# Altium PCB P8.PcbDoc (part 2 of 2)
Units mil, origin at the board's own origin, x right, y up, seen from the top; angles counter-clockwise.
Board outline 3346.46 x 1968.5 mil, 4 copper layers (Top Layer, MidLayer1, Mid-Layer 2, Bottom Layer); 75 components, 59 nets, 241 pads, 150 vias.
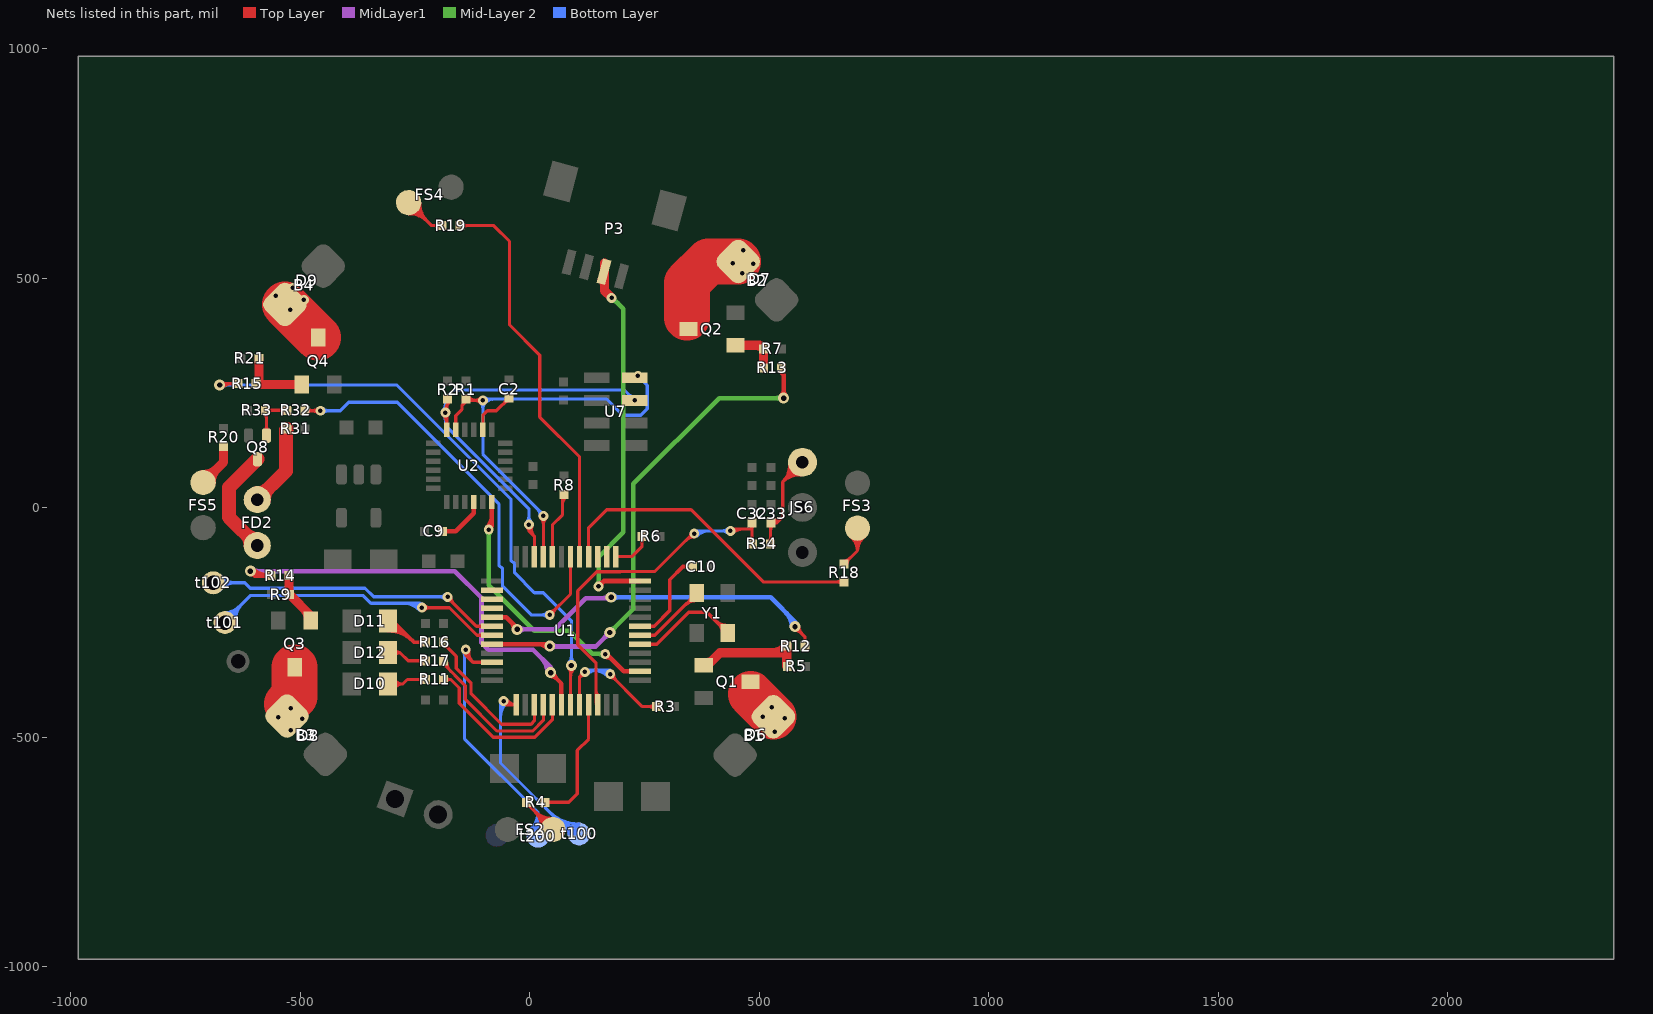
[diagram p4: the nets of this part, all layers, seen from the top]

## Via types
v1: diameter 21.65, hole 9.84, Top Layer to Bottom Layer, 140 vias
v2: diameter 23.82, hole 11.81, Top Layer to Bottom Layer, 10 vias

## Nets (pads, with @x,y where several pads share a name; then routed paths per layer and width w, separated by ;. In a path a pad name is that pad's centre, name@x,y a point inside that pad or via, vN(x,y) a via of type N, cw(c..) or ccw(c..) an arc to the next point about the centre after c; other vN are vias at no path point) (continued)
HW_LT: R19.2 U1.17 | length 896.8
  Top Layer w7: R19.2@-152.56,615.16 -78.74,615.16 -44.29,580.71 -44.29,398.62 21.65,332.68 21.65,197.83 108.27,111.22 U1.17@108.27,-106.3 ; R19.2@-148.08,610.67 cw(c-137.25,599.85) -137.25,615.16 cw(c-137.25,630.47) R19.2@-148.08,619.64
HW_RH: R18.2 U1.16 | length 725.7
  Top Layer w7: U1.16@127.95,-106.3 127.95,-43.31 167.32,-3.94 351.38,-3.94 508.86,-161.42 R18.2@685.04,-161.42 ; R18.2@680.56,-165.9 ccw(c669.73,-176.73) 669.73,-161.42 ccw(c669.73,-146.1) R18.2@680.56,-156.93
HW_RT: R4.2 U1.45 | length 306.8
  Top Layer w7: R4.2@32.48,-641.73 84.65,-641.73 103.35,-623.03 103.35,-528.54 127.95,-503.94 U1.45@127.95,-429.13 ; R4.2@36.96,-646.22 cw(c47.79,-657.04) 47.79,-641.73 cw(c47.79,-626.42) R4.2@36.96,-637.25
HWF_2: R32.1 U1.18 | length 1115
  Top Layer w7: R32.1@-490.15,212.6 -489.16,211.61 v1(-456.69,211.61) ; R32.1@-485.67,208.12 cw(c-477.23,199.68) -477.23,211.61 ; R32.1@-485.67,217.09 ccw(c-472.45,230.3) -472.45,211.61 ; v1@-461.87,206.43 ccw(c-474.38,193.93) -474.38,211.61 ccw(c-474.38,229.3) v1@-461.87,216.79 ; v1(43.31,-233.27) 88.58,-187.99 U1.18@88.58,-106.3 ; v1@43.31,-225.94 ccw(c43.31,-208.25) 55.81,-220.76 ccw(c68.32,-233.27) v1@50.63,-233.27
  Bottom Layer w7: v1(-456.69,211.61) -413.39,211.61 -394.68,230.31 -289.09,230.31 -67.34,8.56 -67.34,-124.94 -59.35,-132.93 -59.35,-170.96 2.95,-233.27 v1(43.31,-233.27) ; v1@-451.51,206.43 cw(c-439,193.93) -439,211.61 cw(c-439,229.3) v1@-451.51,216.79 ; v1@38.13,-238.45 ccw(c25.62,-250.96) 25.62,-233.27 ccw(c25.62,-215.58) v1@38.13,-228.09
HWJ_2: C32.1 R34.2 U1.46 | length 940.8
  Top Layer w7: 144.04,-396.93 ccw(c162.12,-396.93) U1.46@149.34,-409.72 ; U1.46@147.64,-429.13 144.04,-425.54 144.04,-337.6 104.33,-297.89 104.33,-181.1 146.01,-139.42 197.19,-139.42 197.83,-138.78 272.64,-138.78 352.36,-59.06 v1@362.2,-59.06 ; 340.72,-70.7 cw(c358.27,-88.25) v1@358.27,-63.43 ; 347.85,-63.57 ccw(c340.38,-56.1) v1@350.94,-56.1 ; v1(437.01,-50.2) 440.94,-46.26 484.26,-46.26 ; v1@437.24,-50.43 cw(c447.3,-60.49) 447.3,-46.26 ; v1@442.19,-55.38 cw(c464.2,-77.39) 464.2,-46.26 ; C32.1@480.13,-37.29 cw(c472.45,-46.26) 484.26,-46.26 cw(c496.06,-46.26) C32.1@488.38,-37.29 ; R34.2@480.75,-74.26 ccw(c472.29,-65.79) 484.26,-65.79 ; 484.26,-61.06 ccw(c502.91,-61.06) R34.2@489.72,-74.26 ; C32.1@484.26,-32.47 484.26,-46.26 ; R34.2@485.24,-78.74 484.26,-77.76 484.26,-46.26
  Bottom Layer w7: v1@358.5,-56.33 cw(c373.31,-71.15) 373.31,-50.2 ; v1@362.2,-50.2 v1(437.01,-50.2) ; v1@363.45,-61.28 cw(c390.21,-88.05) 390.21,-50.2 ; v1@431.83,-55.38 ccw(c419.32,-67.89) 419.32,-50.2 ccw(c419.32,-32.51) v1@431.83,-45.02
  other v1: 358.27,-56.1
JTCK: t100.1 U1.37 | length 733.6
  Top Layer w7: v1(-57.09,-421.26) -61.02,-421.26 -53.15,-429.13 U1.37@-29.53,-429.13 cw(c-29.53,-403.88) v1@-50.89,-417.35 ; v1@-56.81,-421.09 ccw(c-42.22,-411.88) -42.22,-429.13
  Bottom Layer w7: -63.98,-455.58 cw(c-22.76,-455.58) v1@-51.91,-426.44 ; -63.98,-438.68 cw(c-39.66,-438.68) v1@-56.86,-421.49 ; v1(-57.09,-421.26) -61.02,-421.26 -63.98,-418.31 -63.98,-556.1 90.55,-710.63 t100.1@107.28,-710.63 ; 42.02,-662.1 ccw(c107.28,-596.83) t100.1@107.28,-689.13 ; 53.97,-674.05 ccw(c107.28,-620.73) t100.1@107.28,-696.13 ; 65.92,-686 ccw(c107.28,-644.63) t100.1@107.28,-703.13 ; 77.87,-697.95 ccw(c107.28,-668.53) t100.1@107.28,-710.13 ; 82.41,-702.49 cw(c74.27,-710.63) t100.1@85.78,-710.63
JTMS: t200.1 U1.34 | length 775.2
  Top Layer w7: v1@-143.02,-315.62 cw(c-145.62,-320.87) -139.76,-320.87 ; v1(-139.76,-309.06) -139.76,-320.87 ; v1@-139.44,-309.11 ccw(c-119.14,-312.4) -133.68,-326.95 ; v1@-136.51,-315.62 ccw(c-133.91,-320.87) -139.76,-320.87 ; v1@-132.53,-310.23 ccw(c-102.51,-315.11) -124.02,-336.61 ; U1.34@-82.68,-336.61 -124.02,-336.61 ; -139.76,-320.87 -124.02,-336.61
  Bottom Layer w7: v1@-144.94,-314.24 cw(c-150.32,-319.61) -142.72,-319.61 ; -142.72,-333.87 cw(c-114.95,-333.87) v1@-134.58,-314.24 ; v1(-139.76,-309.06) -142.72,-312.01 -142.72,-502.95 17.72,-663.39 t200.1@17.72,-715.55 ; t200.1@2.51,-700.35 ccw(c-34.19,-663.65) 17.72,-663.65 ccw(c69.62,-663.65) t200.1@32.92,-700.35 ; t200.1@7.46,-705.3 ccw(c-17.29,-680.55) 17.72,-680.55 ccw(c52.72,-680.55) t200.1@27.97,-705.3
LED6: R11.2 U1.41 | length 381.2
  Top Layer w7: R11.2@-187.99,-374.02 -172.6,-374.02 -153.95,-392.66 -153.95,-425.77 -79.72,-500 10.83,-500 49.21,-461.61 U1.41@49.21,-429.13 ; R11.2@-183.51,-378.5 cw(c-172.68,-389.33) -172.68,-374.02 cw(c-172.68,-358.7) R11.2@-183.51,-369.53
LED7: R16.2 U1.39 | length 359.7
  Top Layer w7: R16.2@-187.99,-292.65 -187.99,-296.26 -160.43,-323.82 -160.43,-349.41 -127.95,-381.89 -127.95,-405.31 -61.8,-471.46 2.6,-471.46 9.84,-464.21 U1.39@9.84,-429.13 ; R16.2@-181.65,-292.65 ccw(c-157.61,-292.65) -174.61,-309.64
LED8: R17.2 U1.40 | length 382.8
  Top Layer w7: R17.2@-188.65,-333.33 ccw(c-173.57,-333.33) -184.23,-344 ; R17.2@-187.99,-333.33 -187.99,-340.24 -140.95,-387.27 -140.95,-417.12 -71.85,-486.22 6.22,-486.22 29.53,-462.91 U1.40@29.53,-429.13 ; R17.2@-181.65,-333.33 ccw(c-149.67,-333.33) -172.28,-355.95
MPU-INT: U1.2 U2.12 | length 681.5
  Top Layer w10: v1@-93.69,-43.12 ccw(c-120.27,-16.54) -82.68,-16.54 ; v1(-89.57,-47.24) -82.68,-40.35 U2.12@-82.68,12.8 ; v1@164.37,-324.72 cw(c164.37,-345.92) 179.36,-330.93 ; v1(164.37,-318.9) 167.32,-318.9 204.72,-356.3 U1.2@240.16,-356.3
  Mid-Layer 2 w10: v1@-93.69,-51.36 cw(c-103.63,-61.31) -89.57,-61.31 cw(c-75.5,-61.31) v1@-85.45,-51.36 ; v1(-89.57,-47.24) -89.57,-168.31 9.84,-267.72 85.63,-267.72 135.83,-317.91 v1@164.37,-317.91 ; 147.93,-317.91 cw(c147.93,-335.34) v1@160.25,-323.02 ; 152.68,-317.91 ccw(c152.68,-307.21) v1@160.25,-314.78
NetB1_1: B1.1 D6.1 Q1.3 | length 70
  Top Layer w100: 481.3,-405.78 B1.1@530.77,-455.25
  other v1: 533.19,-487.83 555.12,-458.66 507.87,-454.72 527.56,-434.06
NetB2_2: B2.2 D7.1 Q2.3 | length 206.8
  Top Layer w100: 342.52,414.37 342.52,490.16 389.12,536.76 B2.2@454.23,536.76
  other v1: 462.6,510.83 487.12,531.5 441.93,533.46 464.57,561.02
NetB3_2: B3.2 D8.1 Q3.3 | length 205.6
  Top Layer w30: B3.2@-545.73,-460.04 ccw(c-570.24,-427.17) -529.24,-427.17 B3.2@-529.24,-453.64 ; B3.2@-535.28,-449.72 cw(c-509.32,-456.67) B3.2@-522.76,-433.39 ; B3.2@-534.09,-445.27 cw(c-517.31,-449.77) B3.2@-521.73,-432.97 ; B3.2@-529.24,-447.62 cw(c-510.06,-447.62) B3.2@-523.62,-434.06
  Top Layer w100: B3.2@-529.24,-427.17 -512.79,-410.72 Q3.3@-512.79,-347.44
  other v1: -520.89,-484.26 -495.84,-459.2 -548.23,-456.69 -520.67,-437.01
NetB4_1: B4.1 D9.1 Q4.3 | length 102.1
  Top Layer w100: B4.1@-533.77,443.24 Q4.3@-461.61,371.06
  other v1: -522.64,432.09 -492.48,453.03 -553.25,462.73 -516.73,479.33
NetC2_1: C2.1 U2.20 | length 128.1
  Top Layer w7: U2.20@-102.36,170.28 -102.36,201.77 -92.52,211.61 -72.85,211.61 C2.1@-45.28,239.18 ; C2.1@-51.62,239.18 cw(c-66.94,239.18) -56.11,228.35 cw(c-45.28,217.53) C2.1@-45.28,232.84
NetC9_2: C9.2 U2.10 | length 127.2
  Top Layer w10: C9.2@-189.95,-51.17 -161.41,-51.17 -122.05,-11.81 U2.10@-122.05,12.8 ; C9.2@-186.53,-54.6 cw(c-178.26,-62.87) -178.26,-51.17 cw(c-178.26,-39.48) C9.2@-186.53,-47.75
NetC33_1: C33.1 JS6.1 R34.1 | length 481.2
  Top Layer w7: R34.1@520.12,-74.26 ccw(c509.29,-63.43) 524.61,-63.43 ccw(c539.92,-63.43) R34.1@529.09,-74.26 ; C33.1@521.1,-36.96 cw(c512.63,-45.43) 524.61,-45.43 ; R34.1@524.61,-78.74 524.61,-33.45 C33.1@525.58,-32.47 538.39,-32.47 ; 524.61,-50.15 cw(c543.26,-50.15) C33.1@530.07,-36.96 ; C33.1@525.42,-33.11 ccw(c529.8,-15.75) 542.46,-28.41 ; C33.1@527.13,-26.32 ccw(c533.31,-1.81) 551.18,-19.69 ; C33.1@530.63,-36.32 cw(c538.39,-42.23) 538.39,-32.47 ; C33.1@530.63,-28.63 ccw(c538.39,-22.72) 538.39,-32.47 ; JS6.1@566.11,97.16 cw(c514.74,93.02) 551.18,56.58 ; JS6.1@573.09,97.72 cw(c534.56,94.62) 561.89,67.29 cw(c589.22,39.96) JS6.1@592.33,78.48 ; JS6.1@591.77,71.5 ccw(c587.62,20.14) 551.18,56.58 ; JS6.1@594.02,99.41 551.18,56.57 ; 538.39,-32.47 551.18,-19.69 ; 551.18,-19.69 551.18,56.57
NetD10_2: D10.2 R11.1 | length 154.4
  Top Layer w7: D10.2@-309.05,-383.86 -276.57,-383.86 -266.73,-374.02 R11.1@-227.36,-374.02 ; D10.2@-295.73,-393.59 cw(c-276.58,-407.57) -276.58,-383.86 cw(c-276.58,-360.14) D10.2@-295.73,-374.13 ; R11.1@-231.85,-378.5 ccw(c-242.67,-389.33) -242.67,-374.02 ccw(c-242.67,-358.7) R11.1@-231.85,-369.53
NetD11_2: D11.2 R16.1 | length 258.3
  Top Layer w8: D11.2@-309.05,-268.05 cw(c-309.05,-344.88) -254.73,-290.55 ; D11.2@-309.05,-260.05 cw(c-309.05,-317.56) -268.38,-276.89 ; D11.2@-309.05,-252.05 cw(c-309.05,-290.25) -282.04,-263.24 ; D11.2@-309.05,-247.05 -298.23,-247.05 -252.63,-292.65 R16.1@-227.36,-292.65 ; R16.1@-231.49,-296.78 ccw(c-241.47,-306.75) -241.47,-292.65 ccw(c-241.47,-278.54) R16.1@-231.49,-288.52
NetD12_2: D12.2 R17.1 | length 141
  Top Layer w7: D12.2@-309.05,-315.45 -282.97,-315.45 ; D12.2@-294.14,-322.52 cw(c-282.97,-327.81) -282.97,-315.45 ; D12.2@-294.14,-308.39 ccw(c-282.97,-303.09) -282.97,-315.45 ; R17.1@-231.85,-337.82 ccw(c-242.67,-348.64) -242.67,-333.33 ccw(c-242.67,-318.02) R17.1@-231.85,-328.85 ; R17.1@-227.36,-333.33 -265.09,-333.33 -282.97,-315.45
NetFD2_1: FD2.1 R31.1 | length 236.2
  Top Layer w30: FD2.1@-594.02,17.88 -531.5,80.4 -531.5,170.28 R31.1@-529.52,172.25 ; FD2.1@-594.02,32.41 ccw(c-594.02,67.48) -569.22,42.68 ccw(c-544.42,17.88) FD2.1@-579.49,17.88
NetFD2_2: FD2.2 Q8.3 | length 294.7
  Top Layer w30: FD2.2@-608.54,-82.12 ccw(c-643.62,-82.12) -618.82,-57.32 ccw(c-594.02,-32.52) FD2.2@-594.02,-67.59 ; FD2.2@-594.02,-82.12 -655.51,-20.62 -655.51,44.29 Q8.3@-593.5,106.3
NetFS2_1: FS2.1 R4.1 | length 262.9
  Top Layer w7: R4.1@-6.89,-648.07 cw(c-6.89,-658.16) R4.1@0.24,-651.03 ; R4.1@-6.89,-641.73 -6.89,-643.9 FS2.1@50.2,-700.98 ; R4.1@-0.55,-641.73 ccw(c19.99,-641.73) 5.47,-656.25 ; FS2.1@26.14,-700.98 ccw(c-31.94,-700.98) 9.13,-659.91 ccw(c50.2,-618.84) FS2.1@50.2,-676.93 ; FS2.1@33.14,-700.98 ccw(c-8.05,-700.98) 21.08,-671.86 ccw(c50.2,-642.74) FS2.1@50.2,-683.93
NetFS3_1: FS3.1 R18.1 | length 231.4
  Top Layer w7: R18.1@685.04,-122.05 714.02,-93.07 ; R18.1@685.04,-115.7 ccw(c685.04,-100.39) 695.87,-111.22 ccw(c706.69,-122.05) R18.1@691.38,-122.05 ; FS3.1@699.35,-63.28 cw(c676.44,-93.07) 714.02,-93.07 ; FS3.1@703.62,-57.73 cw(c687.37,-78.85) 714.02,-78.85 cw(c740.66,-78.85) FS3.1@724.42,-57.73 ; FS3.1@714.02,-44.21 714.02,-93.07 ; FS3.1@728.68,-63.28 ccw(c751.59,-93.07) 714.02,-93.07
NetFS4_1: FS4.1 R19.1 | length 273
  Top Layer w7: FS4.1@-264.2,641.12 cw(c-264.2,583.03) -223.13,624.1 cw(c-182.06,665.18) FS4.1@-240.14,665.18 ; FS4.1@-264.2,648.12 cw(c-264.2,606.93) -235.08,636.05 cw(c-205.95,665.18) FS4.1@-247.14,665.18 ; FS4.1@-264.2,665.18 -214.18,615.16 R19.1@-191.93,615.16 ; R19.1@-196.41,610.67 ccw(c-207.24,599.85) -207.24,615.16 ccw(c-207.24,630.47) R19.1@-196.41,619.64
NetFS5_1: FS5.1 R20.1 | length 163.8
  Top Layer w20: FS5.1@-712.01,55.2 -667.32,99.88 R20.1@-667.32,133.86 ; FS5.1@-712.01,72.76 ccw(c-712.01,115.15) -682.03,85.17 ccw(c-652.06,55.2) FS5.1@-694.45,55.2
NetQ1_1: Q1.1 R5.1 R12.1 | length 324.3
  Top Layer w20: Q1.1@378.94,-343.5 386.81,-343.5 414.37,-315.94 545.28,-315.94 ; Q1.1@382.88,-337.76 ccw(c382.88,-314.38) 399.41,-330.91 ; 524.78,-315.94 ccw(c524.78,-265.92) R12.1@560.15,-301.29 ; R12.1@560.2,-301.18 cw(c545.28,-301.02) 545.28,-315.94 ; R5.1@561.02,-345.47 560.04,-344.49 R12.1@560.04,-301.18 545.28,-315.94
NetQ2_1: Q2.1 R7.2 R13.1 | length 126.4
  Top Layer w20: Q2.1@447.83,354.33 500.98,354.33 R7.2@508.86,346.46 R13.1@508.86,305.12 ; 490.23,354.33 cw(c490.23,327.83) R7.2@508.97,346.57
NetQ3_1: Q3.1 R9.2 R14.1 | length 139.1
  Top Layer w20: R14.1@-524.61,-147.64 -524.61,-187.99 R9.2@-523.62,-188.98 -477.36,-235.23 Q3.1@-477.36,-245.08 ; -491.35,-221.25 cw(c-511.25,-241.14) Q3.1@-483.11,-241.14
NetQ4_1: Q4.1 R15.1 R21.2 | length 173.3
  Top Layer w20: R15.1@-596.34,270.56 ccw(c-610.33,284.54) -590.55,284.54 ; R21.2@-590.55,325.79 -590.55,276.57 R15.1@-596.46,270.67 -594.49,268.7 Q4.1@-497.05,268.7
NetQ8_1: Q8.1 R32.2 R33.2 | length 198.4
  Top Layer w7: R33.2@-580.27,208.12 cw(c-595.85,192.54) -573.82,192.54 ; Q8.1@-578.3,167.88 ccw(c-589.13,178.7) -573.82,178.7 ccw(c-558.5,178.7) Q8.1@-569.33,167.88 ; Q8.1@-573.82,157.49 -573.82,210.64 R33.2@-575.78,212.6 R32.2@-529.52,212.6 ; -573.82,202.04 cw(c-565.22,202.04) -571.3,208.12 cw(c-560.47,197.29) -560.47,212.6 cw(c-560.47,227.92) R33.2@-571.3,217.09 ; R32.2@-534.01,208.12 ccw(c-544.84,197.29) -544.84,212.6 ccw(c-544.84,227.92) R32.2@-534.01,217.09
NetR3_1: R3.1 U1.44 | length 427.8
  Top Layer w7: U1.44@108.27,-429.13 108.27,-369.09 ; v1@112.76,-357.59 cw(c97.4,-358.22) 108.27,-369.09 ; v1@119.78,-364.6 ccw(c119.14,-379.96) 108.27,-369.09 ; v1(120.08,-357.28) 108.27,-369.09 ; v1@170.96,-358.78 245.25,-433.07 R3.1@275.59,-433.07 ; v1@175.2,-369.53 cw(c175.2,-385.24) 186.31,-374.13 ; v1@182.52,-362.2 ccw(c202.19,-362.2) 188.28,-376.11 ; R3.1@271.1,-437.56 ccw(c260.28,-448.38) 260.28,-433.07 ccw(c260.28,-417.76) R3.1@271.1,-428.59
  Bottom Layer w7: v1(120.08,-357.28) 123.38,-353.98 v1@175.76,-353.98 ; v1@125.26,-362.46 cw(c145.73,-382.94) 145.73,-353.98 ; 137.66,-353.98 cw(c137.66,-399.74) v1@170.02,-367.39 ; 154.56,-353.98 cw(c154.56,-382.84) v1@174.97,-362.44
  other v1: 175.2,-362.2
NetR6_2: R6.2 U1.13 | length 112.7
  Top Layer w7: U1.13@187.01,-106.3 222.44,-106.3 244.1,-84.64 R6.2@244.1,-62.01 ; R6.2@239.61,-66.49 cw(c228.78,-77.32) 244.1,-77.32 cw(c259.41,-77.32) R6.2@248.58,-66.49
NetR8_2: R8.2 U1.20 | length 173.2
  Top Layer w7: U1.20@49.21,-106.3 49.21,-37.4 70.87,-15.75 70.87,25.59 R8.2@77.76,32.48 ; 70.87,4.71 cw(c99.62,4.71) R8.2@79.29,25.04
NetU1_5: U1.5 Y1.1 | length 297.8
  Top Layer w8: U1.5@240.16,-297.24 276.57,-297.24 346.46,-227.36 385.83,-227.36 Y1.1@431.1,-272.64 ; 404.33,-245.86 ccw(c431.1,-219.09) Y1.1@431.1,-256.95 ; 413.83,-255.37 cw(c400.5,-268.7) Y1.1@419.35,-268.7 ; Y1.1@417.98,-259.52 ccw(c431.1,-246.4) Y1.1@431.1,-264.95
NetU1_6: U1.6 Y1.3 | length 225.8
  Top Layer w7: U1.6@240.16,-277.56 272.64,-277.56 322.34,-227.85 Y1.3@364.17,-186.02 ; 336.54,-213.65 cw(c364.17,-241.28) Y1.3@364.17,-202.21 ; 346.05,-204.15 ccw(c331.86,-189.96) Y1.3@351.93,-189.96 ; Y1.3@348.49,-201.7 cw(c364.17,-217.38) Y1.3@364.17,-195.21
PWM1: R12.2 U1.29 | length 982.1
  Top Layer w7: v2@577.76,-267.27 cw(c577.76,-287.57) 592.11,-273.21 cw(c606.47,-258.86) v2@586.17,-258.86 ; v2(577.76,-258.86) 599.41,-280.51 R12.2@599.41,-301.18 ; R12.2@594.92,-296.7 ccw(c584.1,-285.87) 599.41,-285.87 ccw(c614.72,-285.87) R12.2@603.89,-296.7
  Top Layer w10: U1.29@-82.68,-238.19 -51.18,-238.19 -27.56,-261.81 v2(-27.56,-264.76) ; -41.44,-247.93 cw(c-58.28,-264.76) v2@-34.47,-264.76
  MidLayer1 w10: v2(-27.56,-264.76) 54.13,-264.76 122.05,-196.85 v2@172.24,-196.85 ; v2@-22.67,-269.65 cw(c-10.88,-281.44) -10.88,-264.76 cw(c-10.88,-248.08) v2@-22.67,-259.88 ; 155.73,-196.85 ccw(c155.73,-173.45) v2@172.28,-190 ; 165.24,-196.85 cw(c165.24,-206.81) v2@172.28,-199.77
  Bottom Layer w10: v2(177.17,-194.88) 524.61,-194.88 577.76,-248.03 v2(577.76,-258.86) ; v2@182.05,-199.77 cw(c193.85,-211.56) 193.85,-194.88 cw(c193.85,-178.2) v2@182.05,-190 ; 558.31,-228.58 cw(c528.03,-258.86) v2@570.85,-258.86 ; 575.38,-245.65 cw(c562.17,-258.86) v2@580.85,-258.86
PWM2: R13.2 U1.32 | length 1264.3
  Top Layer w9.84: U1.32@-82.68,-297.24 39.37,-297.24 v2(43.31,-301.18) ; 16.93,-297.24 cw(c16.93,-327.56) v2@38.37,-306.12 ; R13.2@544.29,306.1 544.29,299.21 553.15,290.35 ; v2@548.21,244.11 ccw(c536.28,256.04) 553.15,256.04 ccw(c570.02,256.04) v2@558.09,244.11 ; R13.2@552.21,302.23 ccw(c559.64,296.84) 553.15,290.35 ; v2(553.15,239.17) 553.15,290.35
  MidLayer1 w10: v2@43.31,-302.17 143.7,-302.17 v2(174.21,-271.65) ; v2@48.19,-306.07 cw(c57.61,-315.49) 57.61,-302.17 ; v2@48.19,-296.3 ccw(c62.36,-282.12) 62.36,-302.17 ; v2@167.3,-271.65 cw(c150.62,-271.65) 162.42,-283.45 cw(c174.21,-295.24) v2@174.21,-278.56 ; v2@550.2,242.13 v2(553.15,239.17)
  Mid-Layer 2 w10: v2(174.21,-271.65) 225.39,-220.47 225.39,52.17 412.4,239.17 v2(553.15,239.17) ; v2@174.21,-264.74 ccw(c174.21,-248.06) 186.01,-259.86 ccw(c197.8,-271.65) v2@181.12,-271.65 ; v2@548.26,234.29 ccw(c536.47,222.49) 536.47,239.17 ccw(c536.47,255.85) v2@548.26,244.06
PWM3: R14.2 U1.42 | length 1143.2
  Top Layer w9.84: v2@-611.27,-139.81 ccw(c-592.38,-120.92) -592.38,-147.64 ; v2(-609.25,-137.8) -599.41,-147.64 ; v2@-608.24,-144.71 cw(c-606.74,-154.97) -599.41,-147.64 ; v2@-604.31,-132.85 ccw(c-568.62,-97.16) R14.2@-568.62,-147.64 ; v2@-602.34,-138.81 ccw(c-592.08,-140.31) -599.41,-147.64 ; R14.2@-567.46,-151.12 ccw(c-575.86,-159.52) -575.86,-147.64 ccw(c-575.86,-135.76) R14.2@-567.46,-144.16 ; R14.2@-563.98,-147.64 -599.41,-147.64 ; v2@45.28,-366.24 cw(c45.28,-383.11) 57.21,-371.18 cw(c69.13,-359.25) v2@52.26,-359.25 ; v2(45.28,-359.25) 68.9,-382.87 U1.42@68.9,-429.13
  MidLayer1 w10: v2(-609.25,-137.8) -163.39,-137.79 -105.32,-195.87 -105.32,-294.29 -90.55,-309.06 6.89,-309.06 45.28,-347.44 v2(45.28,-359.25) ; v2@-604.37,-142.68 cw(c-592.57,-154.48) -592.57,-137.79 cw(c-592.57,-121.12) v2@-604.37,-132.91 ; 25.13,-327.29 cw(c-6.83,-359.25) v2@38.37,-359.25 ; 42.2,-344.37 cw(c27.31,-359.25) v2@48.37,-359.25
PWM4: R15.2 U1.43 | length 1446.4
  Top Layer w7: v2(-676.18,267.72) -673.23,270.67 R15.2@-635.83,270.67 ; v2@-670.23,261.77 cw(c-648.75,240.28) -648.75,270.67 ; v2@-670.23,273.66 ccw(c-663.01,280.89) -663.01,270.67 ; R15.2@-640.31,266.18 ccw(c-651.14,255.36) -651.14,270.67 ccw(c-651.14,285.98) R15.2@-640.31,275.15 ; v2@84.6,-349.45 cw(c75,-359.06) 88.58,-359.06 ; U1.43@88.58,-429.13 88.58,-345.47 v2(90.55,-343.5) ; 88.58,-368.56 cw(c115.6,-368.56) v2@96.5,-349.45
  Bottom Layer w7: v2(-676.18,267.72) -289.72,267.72 -41.34,19.33 -41.34,-114.17 -33.35,-122.16 -33.35,-141.84 9.84,-185.04 29.53,-185.04 90.55,-246.06 v2(90.55,-343.5) ; v2@-670.23,261.77 cw(c-655.88,247.41) -655.88,267.72 cw(c-655.88,288.02) v2@-670.23,273.66 ; v2@84.6,-337.56 ccw(c70.25,-323.2) 90.55,-323.2 ccw(c110.85,-323.2) v2@96.5,-337.56
R_INT: U1.14
R_K: U1.15
RST: C10.1 U1.7 | length 229.6
  Top Layer w8: U1.7@240.16,-257.87 271.11,-257.87 305.12,-223.87 305.12,-156.5 333.67,-127.95 C10.1@354.34,-127.95 ; C10.1@350.21,-132.08 ccw(c340.23,-142.05) 340.23,-127.95 ccw(c340.23,-113.84) C10.1@350.21,-123.81
RX: t101.1 U1.31 | length 889.5
  Top Layer w7: v1(-235.24,-217.52) -175.2,-217.52 -115.16,-277.56 U1.31@-82.68,-277.56 ; v1@-230.06,-222.7 cw(c-217.55,-235.21) -217.55,-217.52 cw(c-217.55,-199.83) v1@-230.06,-212.34
  Bottom Layer w7: t101.1@-664.37,-250 -664.37,-246.06 -609.5,-191.2 -362.94,-191.2 -346.46,-207.68 -245.08,-207.68 v1(-235.24,-217.52) ; t101.1@-664.37,-235.5 ccw(c-664.37,-210) -646.34,-228.03 ; t101.1@-664.37,-228.5 ccw(c-664.37,-186.1) -634.39,-216.08 ; t101.1@-649.87,-250 cw(c-605.36,-250) -636.83,-218.53 ; t101.1@-642.87,-250 cw(c-581.46,-250) -624.88,-206.58 ; -276.69,-207.68 cw(c-276.69,-258.97) v1@-240.42,-222.7 ; -259.79,-207.68 cw(c-259.79,-242.07) v1@-235.47,-217.75 ; -242.89,-207.68 cw(c-242.89,-225.17) v1@-230.52,-212.8
SCL: R1.1 U1.21 U2.23 U7.8 | length 1164.1
  Top Layer w7: U2.23@-161.42,170.28 -161.42,200.79 -148.13,214.07 -148.13,222.46 ; R1.1@-145.26,235.1 cw(c-156.73,231.06) -148.13,222.46 ; R1.1@-134.79,241.69 ccw(c-116.84,259.64) -116.84,234.26 ; v1@-107.54,229.08 ccw(c-120.05,216.57) -120.05,234.26 ccw(c-120.05,251.95) v1@-107.54,239.44 ; v1(-102.36,234.26) -136.33,234.26 -148.13,222.46 ; v1@24.35,-22.9 cw(c11.84,-35.4) 29.53,-35.4 cw(c47.22,-35.4) v1@34.71,-22.9 ; U1.21@29.53,-106.3 v1(29.53,-17.72)
  Bottom Layer w7: v1@-107.54,229.08 cw(c-120.05,216.57) -102.36,216.57 cw(c-84.67,216.57) -97.18,229.08 cw(c-77.56,209.46) -77.56,237.2 ; v1@-97.18,239.44 ccw(c-91.78,244.84) -91.78,237.2 ; 14.93,-0.17 cw(c-2.62,-17.72) v1@22.2,-17.72 ; 22.06,-7.3 ccw(c29.53,0.17) v1@29.53,-10.39 ; v1(29.53,-17.72) 29.53,-14.76 -102.36,117.13 v1(-102.36,234.26) -99.42,237.2 167.32,237.2 202.76,201.77 242.13,201.77 255.91,215.55 255.91,266.73 v1(235.24,287.4) ; v1@235.24,280.07 cw(c235.24,262.39) 247.74,274.89 cw(c260.25,287.4) v1@242.56,287.4
SCLK: U1.26
SDA: R2.1 U1.22 U2.24 U7.7 | length 1159.4
  Top Layer w7: v1@-189.24,202.5 cw(c-208.87,182.86) U2.24@-181.1,182.86 ; v1@-187,214.38 ccw(c-190.98,223.43) -181.1,223.43 ; v1(-184.05,207.68) v1@-181.1,210.63 ; R2.1@-181.52,231.33 cw(c-183.54,226.33) -178.15,226.33 cw(c-170.78,226.33) R2.1@-175.27,232.18 ; U2.24@-181.1,170.28 v1@-181.1,210.63 ; -181.1,197.12 cw(c-173.49,197.12) v1@-178.87,202.5 ; -181.1,218.24 ccw(c-173.49,218.24) v1@-178.87,212.86 ; R2.1@-179.13,237.21 -178.15,236.23 -178.15,226.38 -181.1,223.43 ; v1@-6.07,-42.49 cw(c-11.26,-50.2) -1.97,-50.2 ; v1(-1.97,-36.42) -1.97,-50.2 ; v1@-1.66,-36.53 ccw(c14.05,-42.46) 2.17,-54.34 ; v1@2.13,-42.49 ccw(c7.32,-50.2) -1.97,-50.2 ; v1@4.89,-39 ccw(c25.19,-46.67) 9.84,-62.01 ; U1.22@9.84,-106.3 9.84,-62.01 ; v1@-181.1,210.63 -181.1,223.43 ; -1.97,-50.2 9.84,-62.01
  Bottom Layer w7: v1@-189.24,202.5 cw(c-201.74,189.99) -184.05,189.99 cw(c-166.37,189.99) v1@-178.87,202.5 ; v1@-189.24,212.86 ccw(c-201.74,225.37) -184.05,225.37 ccw(c-166.37,225.37) v1@-178.87,212.86 ; v1@-7.15,-31.24 ccw(c-19.66,-18.73) -1.97,-18.73 ccw(c15.72,-18.73) v1@3.21,-31.24 ; v1(-1.97,-36.42) -1.97,-1.65 -184.05,180.43 v1(-184.05,207.68) -184.05,239.17 -166.34,256.89 205.71,256.89 v1(228.35,234.25) ; v1@221.02,234.25 ccw(c203.33,234.25) 215.84,246.76 ccw(c228.35,259.27) v1@228.35,241.58
SDI: U1.28
SDO: U1.27
TX: t102.1 U1.30 | length 876.8
  Top Layer w7: v1@-179.13,-201.22 cw(c-179.13,-215.77) -168.85,-205.49 ; v1(-179.13,-193.9) -179.13,-195.87 -170.48,-204.52 ; v1@-178.87,-201.22 cw(c-178.46,-212.5) -170.48,-204.52 ; v1@-178.64,-201.21 cw(c-177.87,-212.58) -169.81,-204.52 ; v1@-172.26,-196.43 ccw(c-165.05,-199.08) -170.48,-204.52 ; v1@-172.08,-195.87 ccw(c-163.55,-198.26) -169.81,-204.52 ; v1@-171.81,-193.9 ccw(c-150.98,-193.9) -165.71,-208.62 ; U1.30@-82.68,-257.87 -116.46,-257.87 -169.81,-204.52 ; -170.48,-204.52 -169.81,-204.52
  Bottom Layer w7: t102.1@-689.96,-163.39 -621.06,-163.39 -609.25,-175.2 -359.25,-175.2 -340.55,-193.9 v1(-179.13,-193.9) ; t102.1@-679.71,-173.64 cw(c-654.95,-198.39) -654.95,-163.39 cw(c-654.95,-128.38) t102.1@-679.71,-153.13 ; t102.1@-674.76,-178.59 cw(c-638.06,-215.29) -638.06,-163.39 cw(c-638.06,-111.48) t102.1@-674.76,-148.18 ; v1@-184.31,-199.08 ccw(c-196.82,-211.59) -196.82,-193.9 ccw(c-196.82,-176.21) v1@-184.31,-188.72
U2TX: P3.2 U1.12 | length 914.6
  Top Layer w10: v1(149.61,-171.26) 161.42,-159.45 U1.12@240.16,-159.45 ; v1@149.61,-165.43 ccw(c149.61,-151.37) 159.55,-161.31 ccw(c169.5,-171.26) v1@155.43,-171.26
  Top Layer w20: P3.2@157.24,497.64 cw(c144.06,484.46) 162.69,484.46 ; P3.2@162.69,533.34 162.69,473.13 v1(178.15,457.68)
  Mid-Layer 2 w10: v1@145.49,-167.14 ccw(c133.16,-154.82) 150.59,-154.82 ; v1@150.59,-171.26 150.59,-106.3 203.74,-53.15 203.74,434.06 179.13,458.66 v1(178.15,457.68) ; 150.59,-159.57 ccw(c161.3,-159.57) v1@153.73,-167.14 ; v1@178.15,451.85 cw(c178.15,433.03) 191.46,446.34
pads on no net: SP2.4 U1.10 U1.11 U1.33 U1.38 U2.2 U2.3 U2.4 U2.5 U2.6 U2.7 U2.14 U2.15 U2.16 U2.17 U2.19 U2.21 U2.22 U7.6 Y1.2 Y1.4

## Polygon pours and split planes (outlines as drawn)
GND on MidLayer1 "Keep-Out Layer-No Net" (solid, remove dead copper, pour order 4): -600.39,810.04 -589.57,820.87 825.79,820.87 825.79,-860.24 827.76,-862.2 795.28,-829.72 -759.84,-829.72 -759.84,-327.76 -884.84,-202.76
GND on Mid-Layer 2 "Keep-Out Layer-No Net" (solid, remove dead copper, pour order 6): -579.72,889.76 -518.7,828.74 820.87,828.74 820.87,-155.51 980.32,-314.96 387.8,-907.48 336.61,-907.48 -567.91,-907.48 -841.54,-633.86 -897.64,-577.76 -897.64,174.21
GND on Bottom Layer "Keep-Out Layer-No Net" (solid, remove dead copper, pour order 8): -762.8,846.46 739.17,846.46 980.32,605.31 980.32,-149.61 980.32,-694.88 784.45,-890.75 764.76,-871.06 -663.39,-871.06 -663.39,-491.14 -893.7,-260.83
GND on Top Layer "Keep-Out Layer-No Net" (solid, remove dead copper, pour order 10): -802.17,833.66 -782.48,813.98 817.91,813.98 817.91,-879.92 846.46,-908.46 791.34,-853.35 -747.05,-853.35

## Keep-outs
Keep-Out Layer:
  circle w3.94: c0,464.57 r29.53
  circle w3.94: c208.18,-519.69 r25.59
  circle w3.94: c0,0 r767.72
  circle w3.94: c314.59,-519.96 r29.53
  circle w3.94: c-314.59,-519.96 r29.53
  circle w3.94: c-208,-520 r25.59

## Other copper
Top Layer:
  pour cut-out: -348.43,-558.07 -236.46,-540.72 -136.81,-583.66 -99.49,-650.67 -116.14,-697.83 -141.73,-756.89 -271.65,-719.49 -375,-674.21
  pour cut-out: -189.96,149.57 -188.94,150.59 -73.82,150.59 -73.82,33.43 -73.85,33.46 -190.94,33.46
  pour cut-out: -418.31,-623.03 -378.94,-573.82 -353.35,-557.09 -351.87,-527.07 -351.87,-491.63 -490.65,-352.85 -550.69,-352.85 -612.7,-414.86 -626.97,-438.98 -606.3,-470.47 -534.45,-551.18 -454.72,-622.05 -438.98,-629.92
  pour cut-out: 615.16,-425.2 565.94,-385.83 549.21,-360.24 519.19,-358.76 483.76,-358.76 344.98,-497.54 344.98,-557.58 406.99,-619.59 431.1,-633.86 462.6,-613.19 543.31,-541.34 614.17,-461.61 622.05,-445.87
  pour cut-out: 627.95,413.39 578.74,374.02 562.01,348.42 531.99,346.95 496.56,346.95 357.78,485.73 357.78,545.77 419.78,607.78 443.9,622.05 475.39,601.38 556.1,529.53 626.97,449.8 634.84,434.05
  pour cut-out: -423.23,618.11 -383.86,568.9 -358.27,552.17 -356.79,522.15 -356.79,486.71 -495.57,347.93 -555.61,347.93 -617.62,409.94 -631.89,434.06 -611.22,465.55 -539.37,546.26 -459.65,617.13 -443.9,625

## Silkscreen, mask and mechanical layers (free items; w line width, h text height)
Top Overlay:
  text "+" at -346.46,613.19 h60
  text "+" at -736.22,90.55 h60
  text "+" at 711.61,-141.73 h60
  text "+" at 98.43,-735.24 h60

## Text inside footprints (layer, text, board x,y; h text height)
U1: Top Overlay "STM32" at 11.81,-281.5 h32